# Altium PCB PanelMIT.PcbDoc
Units mm, origin at the board's own origin, x right, y up, seen from the top; angles counter-clockwise.
Board outline 275.21 x 86.74 mm, 2 copper layers (Top Layer, Bottom Layer); 24 components, 21 nets, 88 pads, 0 vias.
Unrouted connection lines stored in the file: 1.
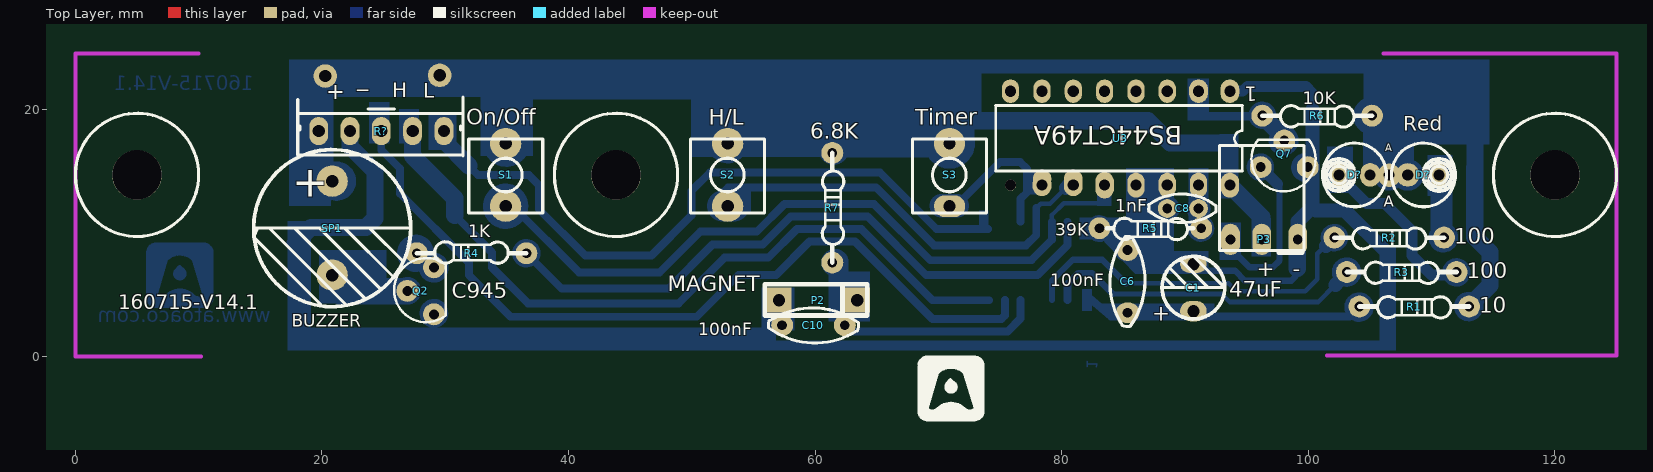
[diagram p0: Top Layer view]
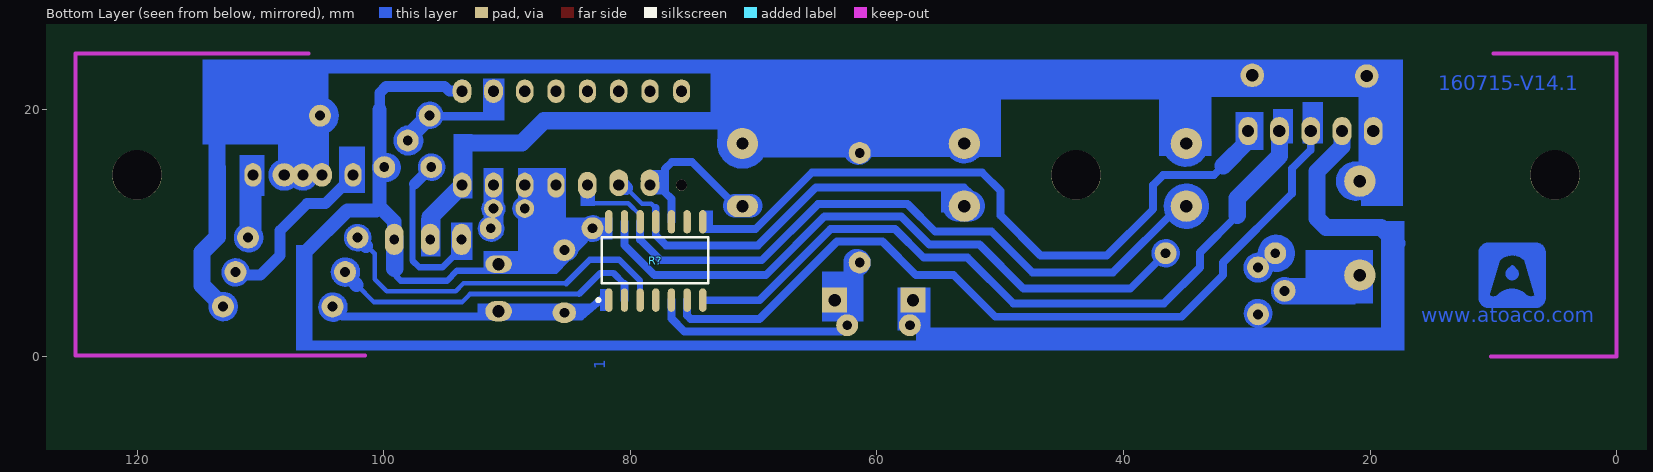
[diagram p1: Bottom Layer view, seen from below]

## Layer stack, top to bottom
Top Layer: signal copper 0.0356
Dielectric: dielectric 0.32, FR-4, Dk 4.8
Bottom Layer: signal copper 0.0356

## Board outline
177.998,41.839 -96.83,41.839 -96.83,-44.902 177.363,-44.902 178.379,-43.886

## Design rules (kind name [scope] priority, off if disabled: settings)
Clearance [All] p1: gap=0.254
PolygonConnect [All] p1: connectstyle=Relief reliefconductorwidth=0.254 reliefentries=4 polygonreliefangle="90 Angle"
RoutingVias [All] p1: holewidth=0.711 width=1.27 viastyle="Through Hole" minholewidth=0.711 minwidth=1.27 maxholewidth=0.711 maxwidth=1.27
SolderMaskExpansion [All] p1: expansion=0.102
TestPointUsage [All] p1: valid=0 allowmultiple=FALSE
Testpoint [All] p1: side=15 testpointundercomponent=TRUE minsize=1.016 maxsize=2.54 preferedsize=1.524 minholesize=0 maxholesize=1.016 preferedholesize=0.813 testpointgrid=0.025 style=1023 order=0-112345678
Width [All] p1: maxlimit=1.905 minlimit=0.254 preferedwidth=0.254 toplayer_maxwidth=0.254 bottomlayer_prefwidth=0.508 minimp=50.000000 maximp=50.000000 favimp=50.000000
19 further rules are at their usual default settings.

## Components (designator, comment, footprint, x,y, rotation, side; value= is the part's Value field where it differs from the comment)
C1 "47uF" RB.15/.2 90.678,4.318 r90 top locked
C6 "100nF" RAD0.2#1 85.344,8.63 r270 top
C8 "1nF" RAD0.1 88.554,12.008 r0 top locked
C10 "100nF" RAD0.2#2 57.324,2.54 r0 top
D? "Green" LED0.5#1 103.744,14.732 r180 top (schematic designator Dred)
D? "Red" LED0.5#2 109.332,14.732 r0 top (schematic designator Dred)
P2 "Magnet" Magnet 63.42,4.572 r180 top
P3 "IrReceiver" IRREC1 96.215,14.732 r0 top locked
Q2 "C945" TO92BS2 28.448,5.328 r270 top
Q7 "2N3904" TO92BS1 98.044,15.996 r0 top
R1 "10" RES0.35 104.14,4.058 r0 top
R2 "100" RES0.35 102.108,9.646 r0 top
R3 "100" RES0.35 103.124,6.852 r0 top
R4 "1K" RES0.35 36.576,8.376 r180 top
R5 "39K" RES0.325 83.058,10.408 r0 top
R6 "10K" RES0.35 96.266,19.536 r0 top
R7 "6.8K" RES0.35 61.388,7.62 r90 top
R? "0" CON5 19.732,18.288 r270 top locked
R? "0" SOIC14 81.738,4.577 r90 bottom locked
S1 "On/Off" PUSHBOT2#1 34.9,14.732 r270 top locked
S2 "H/L" PUSHBOT2#1 52.9,14.732 r270 top locked
S3 "Timer" PUSHBOT2#2 70.9,14.732 r270 top locked
SP1 "BUZZER" Buzzer).3/.6 20.828,10.414 r270 top
U3 "BS44CT49A" DIP16 84.734,17.709 r180 top locked

## Footprints (in the part's own frame and the unit in brackets; to place one, negate y for a bottom-side part, rotate by r counter-clockwise, add the part's x,y. Pads: shape width x height; smd on the part's side, far side on the other; paste and mask are expansions set on the pad)
Buzzer).3/.6 [mil]
  round 100 hole 40: 1(150,0) 2(-150,0)
  silkscreen extent -251,-251 251,251
CON5 [mil] "100mil between pins"
  oval 90x60 hole 39.37: 1(0,0) 2(0,100) 3(0,200) 4(0,300) 5(0,400)
  silkscreen extent -108,-67 79,461
DIP16 [mm]
  oval 1.524x1.905 hole 0.9: 1(-8.9,-3.81) 2(-6.36,-3.81)
  oval 1.397x1.905 hole 0.9: 3(-3.82,-3.81) 4(-1.28,-3.81) 5(1.26,-3.81) 6(3.8,-3.81) 7(6.34,-3.81) 8(8.9,-3.81)
  round 0.9 hole 0.9: 9(8.88,3.81)
  oval 1.524x1.778 hole 0.9: 10(6.34,3.81) 11(3.8,3.81)
  oval 1.5x2.159 hole 0.9: 12(1.26,3.81)
  oval 1.397x2.032 hole 0.9: 13(-1.28,3.81) 14(-3.82,3.81) 15(-6.36,3.81)
  oval 1.5x2.032 hole 0.9: 16(-8.9,3.81)
  silkscreen extent -9.9,-2.65 10.1,2.65
IRREC1 [mil] "38KHz Ir Receiver"
  oval 60x100 hole 31.5: 1(-99.65,-205.95) 2(0.35,-205.95) 3(115,-205.95)
  silkscreen extent -135,-249 135,94
LED0.5#1 [mm] "3 color common anode 0.5mm"
  oval 1.651x1.905 hole 0.9: 1(-1.27,0)
  oval 1.397x1.905 hole 0.9: 2(1.27,0)
  silkscreen extent -2.59,-2.59 2.59,2.59
LED0.5#2 [mm] "3 color common anode 0.5mm"
  round 1.905 hole 0.9: 1(-1.27,0)
  oval 1.397x1.905 hole 0.9: 2(1.27,0)
  silkscreen extent -2.59,-2.59 2.59,2.59
Magnet [mil]
  rect 80x80 hole 39.37: 1(0,0) 2(250,0)
  silkscreen extent -31,-51 295,49
PUSHBOT2#1 [mm] "NO-2pin"
  round 2.54 hole 1: 1(-2.54,0) 2(2.54,0)
  silkscreen extent -2.92,-3 3.08,3
PUSHBOT2#2 [mm] "NO-2pin"
  round 2.54 hole 1: 1(-2.54,0)
  oval 1.778x2.54 hole 1: 2(2.54,0)
  silkscreen extent -2.92,-3 3.08,3
RAD0.1 [mil]
  round 60 hole 31.5: 1(0,0) 2(100,0)
  silkscreen extent -59,-45 156,46
RAD0.2#1 [mil]
  round 70 hole 31.5: 1(0,0)
  oval 65x75 hole 31.5: 2(200,0)
  silkscreen extent -44,-57 244,55
RAD0.2#2 [mil]
  round 70 hole 31.5: 1(0,0) 2(200,0)
  silkscreen extent -44,-57 244,55
RB.15/.2 [mil]
  oval 65x85 hole 39.37: 1(-25,0)
  oval 55x85 hole 39.37: 2(125,0)
  silkscreen extent -50,-100 150,100
RES0.35 [mil] "Diode, Axial; Body 5.2 x 2.7 mm (LxDia. max), Lead Dia. 0.86 mm (max)"
  round 70 hole 31.5: 1(0,0)
  round 70 hole 31.5 paste+0: 2(350,0)
  silkscreen extent 0,-37 350,32
RES0.325 [mil] "Diode, Axial; Body 5.2 x 2.7 mm (LxDia. max), Lead Dia. 0.86 mm (max)"
  round 70 hole 31.5: 1(0,0)
  round 70 hole 31.5 paste+0: 2(325,0)
  silkscreen extent 24,-37 299,32
SOIC14 [mm] "SOIC, 16-Leads, Body 9.9x3.9mm, Pitch 1.27mm, IPC High Density"
  oval 1.9x0.6 smd: 1(0,0) 2(0,-1.27) 3(0,-2.54) 4(0,-3.81) 5(0,-5.08) 6(0,-6.35) 7(0,-7.62) 8(6.351,-7.62) 9(6.351,-6.35) 10(6.351,-5.08) 11(6.351,-3.81) 12(6.351,-2.54) 13(6.351,-1.27) 14(6.351,0)
  silkscreen extent -0.12,-8.08 5.08,0.98, body extent 0.4,-8.08 5.97,0.51, height 1.75
TO92BS1 [mil] "NPN-2N3904"
  round 70 hole 31.5: 1(-75,-25) 2(0,60) 3(75,-25)
  silkscreen extent -105,-102 100,63
TO92BS2 [mil] "NPN-CC5551,C945 Base Side"
  round 70 hole 31.5: 1(-75,25) 2(0,-60) 3(75,25)
  silkscreen extent -105,-102 100,63

## Part data
C1 C10: library part Cap, "Capacitor SMD"
C6 C8: library part "Cap Pol", "Polarized Capacitor (SMD)"
D? D?: library part LED0.5, "LED Radial 0.5"
P2: library part "Header 6", "Header, 6-Pin"
P3: library part "Header 3", "3pin"
Q2 Q7: library part BC337, "NPN General Purpose Amplifier"
R1 R2 R3 R4 R5 R6 R7: library part Resistor, "Resistor"
S1 S2 S3: library part SW-PB, "Push Botton"

## Free pads (board coordinates)
  round 1.905 hole 1: 0(29.54,22.803) 1(20.269,22.752)
  round 4 hole 4: 1(5,14.732) 2(120,14.732) 3(43.845,14.732)
  round 1.524 all layers, no hole: 1(80.924,14.395) 2(78.41,14.395)
  round 1.905 hole 0.9: 4(106.553,14.71)

## Nets (pads, with @x,y where several pads share a name; then routed paths per layer and width w, separated by ;. In a path a pad name is that pad's centre, name@x,y a point inside that pad or via, vN(x,y) a via of type N, cw(c..) or ccw(c..) an arc to the next point about the centre after c; other vN are vias at no path point)
+5V: D?.1 P3.2 pad.0 pad.1@20.269,22.752 pad.4 R1.2 R6.2 R7.2 R?.1@19.732,18.288 S1.1 S2.1 S3.1 SP1.2 U3.16 | length 202.8
  Bottom Layer w0.381: 54.316,17.272 ccw(c52.9,17.272) 54.316,17.272 ; D?.1@107.62,14.71 ccw(c106.553,14.71) D?.1@107.62,14.71 ; 109.161,14.732 ccw(c108.062,14.732) 109.161,14.732
  Bottom Layer w0.508: SP1.2@19.566,14.224 cw(c21.176,14.224) 19.964,15.285 ; 33.6,17.272 cw(c34.95,17.272) 34.9,18.621 cw(c34.95,17.272) 36.3,17.272 ; 106.325,17.298 ccw(c105.562,17.758) 106.452,17.758 ; 113.944,4.058 ccw(c113.001,4.058) 113.944,4.058
  Bottom Layer w0.635: 62.404,16.764 ccw(c61.506,16.764) 62.404,16.764
  Bottom Layer w0.762: 22.388,14.224 ccw(c21.176,14.224) 22.388,14.224 ; 36.455,17.272 ccw(c34.95,17.272) 36.455,17.272
  Bottom Layer w0.889: 72.517,17.291 ccw(c70.898,17.291) 72.517,17.291 ; 106.241,19.536 ccw(c105.156,19.536) 106.241,19.536
  Bottom Layer w1.397: 19.909,21.748 29.82,21.748 ; 30.099,21.748 33.345,21.748 34.463,21.621 52.756,21.621 ; S1.1 34.925,17.297 S1.1@34.95,17.272 ; 52.9,20.486 52.756,21.621 ; 62.687,16.947 62.687,20.071 ; 69.546,18.593 70.082,19.129 70.9,19.129 86.993,19.129 88.796,17.326 93.634,17.326 U3.16 96.224,11.309 P3.2 ; 71.045,20.63 52.756,21.621 ; R6.2@105.562,19.817 110.287,19.817 ; 105.786,17.837 106.325,17.298 106.376,17.247 ; R1.2@113.005,4.058 114.732,5.785 114.732,8.455 113.487,9.7 113.487,15.34 ; 113.13,20.856 113.513,20.474 113.513,14.903
  Bottom Layer w1.905: 19.964,13.213 19.964,15.285 19.964,21.341 20.09,21.466 ; S1.1 34.9,18.621 ; S2.1 52.9,20.196 ; S3.1 70.9,19.129 70.9,20.097
BUZZER: R4.1 R?.13 | length 57.6
  Bottom Layer w0.635: R4.1 39.446,5.505 48.097,5.505 51.679,9.087 55.743,9.087 58.015,11.359 64.253,11.359 69.008,6.604 78.035,6.604 80.468,9.037 R?.13 ; R4.1@37.408,8.376 ccw(c36.576,8.376) R4.1@37.408,8.376
GND: C1.2 C6.1 C8.1 C10.1 P2.2 P3.3 Q2.3 Q7.3 R5.1 R?.2@22.272,18.288 R?.14 U3.1 U3.13 U3.14 | length 92.6
  Bottom Layer w0.254: 84.023,10.382 ccw(c83.055,10.382) 84.023,10.382 ; 89.444,12.008 ccw(c88.554,12.008) 89.444,12.008
  Bottom Layer w0.381: 86.233,8.833 ccw(c85.29,8.833) 86.233,8.833
  Bottom Layer w0.508: 88.342,7.493 88.882,6.953 92.911,6.953 94.058,6.953 94.856,6.155 98.612,6.155 98.959,6.502 ; 29.997,3.499 ccw(c29.076,3.499) 29.997,3.499 ; Q7.3@100.686,15.335 ccw(c99.771,15.335) Q7.3@100.686,15.335
  Bottom Layer w0.889: U3.1 94.671,21.519 95.047,21.895 99.797,21.895 100.315,21.377 100.315,20.269
  Bottom Layer w1.143: 87.401,13.668 87.401,14.1 ; U3.1@93.634,21.529 U3.1@93.634,21.895 ; P3.3 99.136,10.946 100.337,12.147 ; 100.337,20.012 100.337,12.147 ; 106.375,1.524 106.375,8.426 102.946,11.855 100.628,11.855 100.337,12.147
  Bottom Layer w1.397: 17.832,9.195 19.105,10.468 23.55,10.468 24.304,11.222 24.304,15.006 22.272,17.038 R?.2@22.272,18.288 ; 99.094,7.14 P3.3@99.094,9.633
IRSEN: Q7.2 R6.1 U3.2 | length 19.5
  Bottom Layer w0.508: R6.1@97.13,19.561 ccw(c96.266,19.561) R6.1@97.13,19.561 ; 98.958,17.52 ccw(c97.992,17.52) 98.958,17.52
  Bottom Layer w0.635: 91.094,20.214 91.801,19.507 94.265,19.507 ; 94.813,19.507 95.27,19.507
  Bottom Layer w1.397: 91.094,20.214 U3.2 ; R6.1 98.044,17.758 Q7.2
KEY1: R?.12 S1.2 U3.12 | length 68.9
  Bottom Layer w0.356: R?.12@79.198,11.481 80.157,12.44
  Bottom Layer w0.381: R?.12 R?.12@79.198,11.481 ; 80.157,12.44 83.083,12.44 U3.12@83.474,12.831
  Bottom Layer w0.635: S1.2 35.477,12.192 40.843,6.826 47.386,6.826 50.688,10.128 55.26,10.128 57.507,12.375 64.761,12.375 69.333,7.803 77.533,7.803 79.198,9.469 R?.12 ; 36.42,12.192 ccw(c34.9,12.192) 36.42,12.192
  Bottom Layer w0.889: U3.12@83.474,12.831 U3.12
KEY2: pad.1@80.924,14.395 R?.11 S2.2 U3.11 | length 34.4
  Bottom Layer w0.356: 78.289,12.395 79.046,12.395 U3.11@80.329,13.679
  Bottom Layer w0.381: 77.928,12.034 78.289,12.395
  Bottom Layer w0.635: S2.2@52.4,13.176 52.94,13.716 64.944,13.716 69.649,9.011 77.089,9.011 77.928,9.85 R?.11@77.928,10.77 ; R?.11 77.928,12.034
  Bottom Layer w1.143: U3.11@80.329,13.679 pad.1@80.586,13.935
  Bottom Layer w2.54: S2.2@52.502,12.211 S2.2@53.391,12.211
KEY3: pad.2@78.41,14.395 R?.10 S3.2 U3.10 | length 15.5
  Bottom Layer w0.635: S3.2@70.841,12.211 70.9,12.27 70.9,12.211 S3.2 71.406,12.192 74.981,15.767 76.632,15.767 77.191,15.208 77.191,13.634 ; R?.10 76.658,12.796 77.191,13.329 77.191,13.634 ; 77.482,14.077 77.191,13.634
  Bottom Layer w1.143: 77.482,14.077 pad.2@78.42,14.077
  Bottom Layer w1.905: S3.2@70.206,12.211 S3.2@71.538,12.211
LED1: R2.1 R?.3@79.198,4.577 | length 34.5
  Bottom Layer w0.381: 85.192,5.937 93.523,5.937 94.158,5.302 99.746,5.302 100.711,6.267 100.711,8.35 101.194,8.833 ; R2.1@102.26,9.784 R2.1@102.565,9.48
  Bottom Layer w0.508: R?.3@79.198,4.577 79.198,6.147 80.905,7.854 83.275,7.854 85.192,5.937 ; R2.1@102.972,9.646 ccw(c102.108,9.646) R2.1@102.972,9.646
  Bottom Layer w1.143: 101.422,8.96 R2.1@101.849,9.386
LED2: R3.1 R?.2@80.468,4.577 | length 34.7
  Bottom Layer w0.381: 84.15,5.074 92.989,5.074 93.64,4.423 100.797,4.423 102.184,5.81
  Bottom Layer w0.508: 80.468,5.887 81.356,6.775 82.448,6.775 84.15,5.074 ; 102.153,6.852 ccw(c103.095,6.852) 102.497,6.123 ccw(c103.095,6.852) 104.038,6.852 ; 104.038,6.852 ccw(c103.095,6.852) 104.038,6.852
  Bottom Layer w0.635: R?.2@80.468,4.577 80.468,5.887
  Bottom Layer w1.143: 102.184,5.81 102.497,6.123 R3.1@102.8,6.426
MAGNET: C10.2 P2.1 R7.1 R?.5@76.658,4.577 | length 24.6
  Bottom Layer w0.635: C10.2 62.912,2.032 75.612,2.032 76.658,3.078 R?.5@76.658,4.577 ; 62.404,7.62 ccw(c61.609,7.62) 62.404,7.62
  Bottom Layer w1.651: 61.895,4.55 R7.1@61.895,7.752
NetC8_2: C8.2 R5.2 U3.15 | length 15
  Bottom Layer w0.254: 91.958,11.982 ccw(c91.094,11.982) 91.958,11.982 ; 92.253,10.382 ccw(c91.288,10.382) 92.253,10.382
  Bottom Layer w1.397: R5.2@91.094,10.408 U3.15
NetD1_2: D?.2@110.602,14.732 R2.2 | length 5.6
  Bottom Layer w0.635: R2.2@111.836,9.646 ccw(c110.949,9.646) R2.2@111.836,9.646
NetD1_3: D?.2@102.474,14.732 R3.2 | length 19.3
  Bottom Layer w0.508: 112.903,6.826 ccw(c112.006,6.826) 112.903,6.826
  Bottom Layer w0.889: D?.2@102.474,14.732 102.474,14.639 104.699,12.414 106.197,12.414 108.407,10.204 108.407,8.182 109.991,6.598 R3.2@111.506,6.598
NetP3_1: P3.1 Q7.1 | length 19.8
  Bottom Layer w0.508: P3.1@93.684,9.43 P3.1 ; P3.1@93.684,10.047 P3.1 ; 97.511,13.938 97.663,13.786 97.663,7.791 97.104,7.233 95.225,7.233 93.684,8.773 P3.1 ; Q7.1@96.977,15.361 ccw(c96.114,15.361) Q7.1@96.977,15.361
  Bottom Layer w0.889: Q7.1 97.511,13.989
NetQ2_1: Q2.1 R4.2 | length 12.3
  Bottom Layer w0.508: 30.023,7.207 ccw(c29.065,7.207) 30.023,7.207
  Bottom Layer w1.016: 28.6,8.376 ccw(c27.599,8.376) 28.6,8.376
NetQ2_2: Q2.2 SP1.1 | length 5.5
  Bottom Layer w0.508: Q2.2@27.788,5.328 ccw(c26.917,5.328) Q2.2@27.788,5.328
RELAY1: R?.5@29.892,18.288 R?.8 | length 55.8
  Bottom Layer w0.635: 31.902,15.472 32.662,14.712 36.793,14.712 37.592,13.913 37.592,11.957 41.351,8.198 46.726,8.198 49.962,11.434 49.962,13.43 51.447,14.915 65.269,14.915 69.827,10.357 R?.8@74.016,10.357
  Bottom Layer w1.397: R?.5@29.892,18.288 29.892,17.482 31.902,15.472 ; 30.176,17.196 30.176,17.198
RELAY2: R?.4@27.352,18.288 R?.7 | length 60.1
  Bottom Layer w0.635: 30.777,11.457 33.789,8.445 33.789,7.225 36.703,4.312 48.936,4.312 52.644,8.02 56.2,8.02 58.523,10.343 63.745,10.343 69.516,4.572 R?.7@74.088,4.572
  Bottom Layer w1.397: R?.4@27.352,18.288 27.352,16.256 30.777,12.831 30.777,11.457 30.794,11.44
RST: 
SCK: 
VMIC: C1.1 C6.2 R1.1 R?.1@81.738,4.577 | length 28.4
  Bottom Layer w0.508: 105.054,4.007 ccw(c104.111,4.007) 105.054,4.007
  Bottom Layer w0.635: 82.192,4.791 83.993,3.257 103.327,3.257
  Bottom Layer w1.143: R1.1@103.607,3.524 R1.1
pads on no net: R?.3@24.812,18.288 R?.4@77.928,4.577 R?.6 R?.9 U3.3 U3.4 U3.5 U3.6 U3.7 U3.8 U3.9
copper on no net: | length 100.9
  Bottom Layer w0.254: 5.867,8.374 5.867,4.818 ccw(c6.566,4.754) 6.502,4.056 10.312,4.056 ccw(c10.376,4.754) 11.074,4.691 11.074,8.374 ccw(c10.376,8.437) 10.439,9.136 6.629,9.136 ccw(c6.566,8.437) 5.867,8.501 ; 6.502,4.945 ccw(c6.947,5.389) 7.391,4.945 cw(c8.471,3.865) 9.55,4.945 ccw(c9.995,5.389) 10.439,4.945 9.567,7.803 ; 6.528,4.945 7.391,7.866 cw(c8.471,6.786) 9.55,7.866 ; 8.141,6.975 ccw(c8.473,6.718) 8.801,6.981 8.429,7.305 8.141,6.975
  Bottom Layer w0.635: 24.812,18.288 24.812,16.764 26.336,15.24 26.336,13.208 31.924,7.62 31.924,6.604 35.297,3.231 50.395,3.231 53.768,6.604 56.816,6.604 59.539,9.327 63.237,9.327 69.516,3.048 75.104,3.048 75.388,3.332 75.388,4.577

## Keep-outs
Keep-Out Layer:
  lines w0.305: 0,24.5 0,0 10.211,0 ; 0,24.587 10.008,24.587 ; 101.52,0.087 125,0.087 125,24.5 ; 106.092,24.587 125,24.587

## Other copper
Bottom Layer:
  rectangle net GND: 105.752,0.508 107.108,9.049
  rectangle net KEY3: 77.292,13.125 78.42,15.132
  rectangle net KEY1: 82.855,12.211 84.023,13.43
  rectangle net +5V: 17.333,23.666 114.706,24.098
  rectangle net KEY2: 52.502,11.684 54.784,13.506
  rectangle net KEY2: 54.153,12.135 54.661,13.176
  rectangle net +5V: 72.238,17.723 72.923,18.891
  rectangle net +5V: 70.333,18.891 73.5,20.847
  rectangle net GND: 55.651,2.102 58.34,5.588
  rectangle net NetD1_3: 101.498,13.252 103.632,17.037
  rectangle net GND: 88.29,6.759 91.917,8.553
  rectangle net NetP3_1: 92.812,7.817 94.539,10.865
  rectangle net +5V: 95.377,8.096 96.952,11.249
  rectangle net NetD1_2: 109.677,13.024 111.684,16.326
  rectangle net GND: 17.192,2.369 19.122,10.998
  rectangle net GND: 17.192,0.508 56.816,2.369
  rectangle net GND: 54.784,0.508 107.112,1.295
  rectangle net +5V: 72.441,22.939 114.706,23.666
  rectangle net +5V: 104.445,14.125 108.56,18.189
  rectangle net GND: 99.713,14.303 100.348,16.386
  rectangle net +5V: 92.787,12.827 94.336,18.034
  rectangle net NetC8_2: 90.272,9.849 91.897,15.291
  rectangle net +5V: 36.728,20.847 73.508,23.666
  rectangle net IRSEN: 90.196,19.126 95.581,19.837
  rectangle net IRSEN: 90.196,19.736 91.949,22.555
  rectangle net NetD1_2: 109.906,9.493 111.684,16.291
  rectangle net GND: 81.458,9.49 85.545,11.271
  rectangle net +5V: 61.613,16.157 71.169,16.767
  rectangle net GND: 85.217,7.944 89.103,15.294
  rectangle net MAGNET: 61.079,2.848 64.465,6.912
  rectangle net +5V: 49.936,16.199 72.187,22.041
  rectangle net +5V: 32.839,16.275 37.109,21.99
  rectangle net NetQ2_2: 21.192,4.235 26.772,6.369
  rectangle net +5V: 104.47,17.199 114.706,23.666
  rectangle net +5V: 17.324,12.192 20.748,22.431
  rectangle net VMIC: 83.261,3.524 92.406,4.293
  rectangle net GND: 23.796,17.272 25.472,20.653
  rectangle net RELAY2: 26.26,17.272 27.86,20.069
  rectangle net RELAY1: 28.641,16.764 30.908,19.825
  rectangle net RELAY1: 73.297,10.011 74.054,11.86
  rectangle net VMIC: 81.653,3.702 82.436,5.464
  rectangle net +5V: 17.333,21.463 36.728,23.666
  rectangle net NetQ2_2: 19.762,4.286 25.24,8.639
  region: 8.568,7.184 8.788,6.964 8.788,6.596 8.534,6.342 8.28,6.342 8.153,6.469 8.153,6.962 8.141,6.975
  region: 6.375,9.136 10.439,9.136 10.82,9.009 10.947,8.628 10.947,4.818 11.074,4.691 10.947,4.31 10.566,4.183 6.629,4.183 6.502,4.056 6.121,4.31 5.867,4.691 5.867,5.326 6.248,5.199 6.717,5.585 6.841,6.003 7.391,7.866 7.899,8.247 8.915,8.374 9.423,7.866 9.55,7.866 9.55,7.672 9.801,7.422 9.801,6.788 10.013,6.576 10.013,5.987 10.259,5.742 10.259,5.287 10.439,5.106 10.439,4.945 10.312,4.945 10.058,4.691 9.677,4.691 9.042,5.326 7.772,5.326 7.264,4.818 6.629,4.818 6.502,4.945 6.717,5.585 6.248,5.199 5.867,5.326 5.867,8.501
  region net GND: 83.007,9.798 85.979,6.725 89.56,6.725 89.52,6.759 85.622,10.595 85.088,10.061 83.482,10.29
  text "160715-V14.1" at 14.478,21.203 h2.03
  text "www.atoaco.com" at 15.85,2.356 h2.03
  text "1" at 81.708,-1.016 h1.52 r270

## Silkscreen, mask and mechanical layers (free items; w line width, h text height)
Top Overlay:
  circle w0.254: c120,14.732 r5
  circle w0.254: c5,14.732 r5
  circle w0.254: c43.845,14.732 r5
  region: 71.113,-1.997 71.333,-2.218 71.333,-2.586 71.079,-2.84 70.825,-2.84 70.698,-2.713 70.698,-2.219 70.686,-2.207
  region: 68.92,-0.046 72.984,-0.046 73.365,-0.173 73.492,-0.554 73.492,-4.364 73.619,-4.491 73.492,-4.872 73.111,-4.999 69.174,-4.999 69.047,-5.126 68.666,-4.872 68.412,-4.491 68.412,-3.856 68.793,-3.983 69.262,-3.597 69.386,-3.179 69.936,-1.316 70.444,-0.935 71.46,-0.808 71.968,-1.316 72.095,-1.316 72.095,-1.509 72.346,-1.76 72.346,-2.394 72.558,-2.606 72.558,-3.194 72.804,-3.44 72.804,-3.895 72.984,-4.075 72.984,-4.237 72.857,-4.237 72.603,-4.491 72.222,-4.491 71.587,-3.856 70.317,-3.856 69.809,-4.364 69.174,-4.364 69.047,-4.237 69.262,-3.596 68.793,-3.983 68.412,-3.856 68.412,-0.681
  lines w0.254: 68.412,-0.808 68.412,-4.364 ccw(c69.111,-4.427) 69.047,-5.126 72.857,-5.126 ccw(c72.921,-4.427) 73.619,-4.491 73.619,-0.808 ccw(c72.921,-0.744) 72.984,-0.046 69.174,-0.046 ccw(c69.111,-0.744) 68.412,-0.681 ; 69.047,-4.237 ccw(c69.492,-3.792) 69.936,-4.237 cw(c71.016,-5.316) 72.095,-4.237 ccw(c72.54,-3.792) 72.984,-4.237 72.112,-1.378 ; 69.073,-4.237 69.936,-1.316 cw(c71.016,-2.395) 72.095,-1.316 ; 70.686,-2.207 ccw(c71.018,-2.464) 71.346,-2.201 70.975,-1.877 70.686,-2.207
  text "1" at 95.834,22.295 h2.03 r180
  text "_" at 22.86,21.507 h2.29
  text "H" at 25.679,20.618 h2.03
  text "L" at 28.194,20.568 h2.03
  text "+" at 20.345,20.441 h2.29
  text "Red" at 107.681,17.907 h2.03
  text "+" at 17.595,12.957 h2.54
  text "+" at 95.809,6.496 h1.27
  text "-" at 98.73,6.496 h1.27
  text "MAGNET" at 48.031,5.302 h1.27
  text "160715-V14.1" at 3.48,3.423 h2.03
  text "+" at 87.351,2.915 h1.27

## Text inside footprints (layer, text, board x,y; h text height)
D?: Top Overlay "A" at 106.121,11.805 h1.52
D?: Top Overlay "A" at 106.248,16.453 h1